# EAGLE board BeagleBone-Stomp-v0.1 (EAGLE 6.3)

Size 100 x 80 mm. Coordinates in mm from the lower left corner, seen from the top.
Outline: 0,0 100,0 100,80 0,80 0,0
Copper layers (1*16): Top 0.035mm / dielectric 1.5mm / Bottom 0.035mm
Design rules "default": minimum track width 10mil, minimum drill 24mil, track to track 8mil, track to pad 8mil, pad to pad 8mil, via to via 8mil, smd to smd 8mil, copper to edge 40mil, drill to drill 8mil, minimum pad ring 10mil, minimum via ring 8mil, stop-mask expansion 4mil, vias tented up to drill 0mil, thermal gap 10mil

## Footprints (pad centres in the part's own frame; a part is rotated, then mirrored left to right if it is on the bottom)
0402 = smd 0.7 x 0.9: 1 -0.65,0; 2 0.65,0
0805 = smd 1.3 x 1.5: 1 -0.95,0; 2 0.95,0
_0402 = smd 0.6 x 0.6: 1 -0.508,0; 2 0.508,0
2,15/1,0 = drill 1.016 pad 2.159 octagon: 1 0,0
1X20_ROUND = drill 1 pad 1.676: 1 -24.13,0; 2 -21.59,0; 3 -19.05,0; 4 -16.51,0; 5 -13.97,0; 6 -11.43,0; 7 -8.89,0; 8 -6.35,0; 9 -3.81,0; 10 -1.27,0; 11 1.27,0; 12 3.81,0; 13 6.35,0; 14 8.89,0; 15 11.43,0; 16 13.97,0; 17 16.51,0; 18 19.05,0; 19 21.59,0; 20 24.13,0
1X06_ROUND = drill 1 pad 1.676: 1 -6.35,0; 2 -3.81,0; 3 -1.27,0; 4 1.27,0; 5 3.81,0; 6 6.35,0
DIPSWITCH_2PIN = smd 1.1 x 2: 1A -1.27,-4.4; 1B -1.27,4.4; 2A 1.27,-4.4; 2B 1.27,4.4
RHB32_3P45X3P45 = smd 0.838 x 0.279: 1 -2.464,1.753; 2 -2.464,1.245; 3 -2.464,0.762; 4 -2.464,0.254; 5 -2.464,-0.254; 6 -2.464,-0.762; 7 -2.464,-1.245; 8 -2.464,-1.753; 17 2.464,-1.753; 18 2.464,-1.245; 19 2.464,-0.762; 20 2.464,-0.254; 21 2.464,0.254; 22 2.464,0.762; 23 2.464,1.245; 24 2.464,1.753 | smd 0.279 x 0.838: 9 -1.753,-2.464; 10 -1.245,-2.464; 11 -0.762,-2.464; 12 -0.254,-2.464; 13 0.254,-2.464; 14 0.762,-2.464; 15 1.245,-2.464; 16 1.753,-2.464; 25 1.753,2.464; 26 1.245,2.464; 27 0.762,2.464; 28 0.254,2.464; 29 -0.254,2.464; 30 -0.762,2.464; 31 -1.245,2.464; 32 -1.753,2.464 | smd 3.454 x 3.454: 33 0,0 | drill 0.254: V 1.168,1.168; V_2 -1.168,-0.406; V_3 -1.168,-1.168; V_4 -1.168,0.406; V_5 -1.168,1.168; V_6 -0.406,-1.168; V_7 -0.406,-0.406; V_8 -0.406,0.406; V_9 -0.406,1.168; V_10 0.406,-1.168; V_11 0.406,-0.406; V_12 0.406,0.406; V_13 0.406,1.168; V_14 1.168,-1.168; V_15 1.168,-0.406; V_16 1.168,0.406
DRB8_1P75X1P5 = smd 0.838 x 0.356: 1 -1.473,0.965; 2 -1.473,0.33; 3 -1.473,-0.33; 4 -1.473,-0.965; 5 1.473,-0.965; 6 1.473,-0.33; 7 1.473,0.33; 8 1.473,0.965 | smd 1.499 x 1.753: 9 0,0 | drill 0.254: V 0,-0.406; V_2 0,0.406
SOIC8_150MIL = smd 0.6 x 2.2: 1 -1.905,-2.6; 2 -0.635,-2.6; 3 0.635,-2.6; 4 1.905,-2.6; 5 1.905,2.6; 6 0.635,2.6; 7 -0.635,2.6; 8 -1.905,2.6
NMJ4HFD2 = drill 1.4 pad 2.54 long: S 6.35,8.115; SN 6.35,-8.115; T -6.35,8.115; TN -6.35,-8.115
BEAGLEBONE_SHIELD = drill 1 square: 1 4.445,19.05; 47 52.705,19.05 | drill 1: 2 1.905,19.05; 3 4.445,21.59; 4 1.905,21.59; 5 4.445,24.13; 6 1.905,24.13; 7 4.445,26.67; 8 1.905,26.67; 9 4.445,29.21; 10 1.905,29.21; 11 4.445,31.75; 12 1.905,31.75; 13 4.445,34.29; 14 1.905,34.29; 15 4.445,36.83; 16 1.905,36.83; 17 4.445,39.37; 18 1.905,39.37; 19 4.445,41.91; 20 1.905,41.91; 21 4.445,44.45; 22 1.905,44.45; 23 4.445,46.99; 24 1.905,46.99; 25 4.445,49.53; 26 1.905,49.53; 27 4.445,52.07; 28 1.905,52.07; 29 4.445,54.61; 30 1.905,54.61; 31 4.445,57.15; 32 1.905,57.15; 33 4.445,59.69; 34 1.905,59.69; 35 4.445,62.23; 36 1.905,62.23; 37 4.445,64.77; 38 1.905,64.77; 39 4.445,67.31; 40 1.905,67.31; 41 4.445,69.85; 42 1.905,69.85; 43 4.445,72.39; 44 1.905,72.39; 45 4.445,74.93; 46 1.905,74.93; 48 50.165,19.05; 49 52.705,21.59; 50 50.165,21.59; 51 52.705,24.13; 52 50.165,24.13; 53 52.705,26.67; 54 50.165,26.67; 55 52.705,29.21; 56 50.165,29.21; 57 52.705,31.75; 58 50.165,31.75; 59 52.705,34.29; 60 50.165,34.29; 61 52.705,36.83; 62 50.165,36.83; 63 52.705,39.37; 64 50.165,39.37; 65 52.705,41.91; 66 50.165,41.91; 67 52.705,44.45; 68 50.165,44.45; 69 52.705,46.99; 70 50.165,46.99; 71 52.705,49.53; 72 50.165,49.53; 73 52.705,52.07; 74 50.165,52.07; 75 52.705,54.61; 76 50.165,54.61; 77 52.705,57.15; 78 50.165,57.15; 79 52.705,59.69; 80 50.165,59.69; 81 52.705,62.23; 82 50.165,62.23; 83 52.705,64.77; 84 50.165,64.77; 85 52.705,67.31; 86 50.165,67.31; 87 52.705,69.85; 88 50.165,69.85; 89 52.705,72.39; 90 50.165,72.39; 91 52.705,74.93; 92 50.165,74.93
FXO-HC735-12 = smd 1.8 x 2: E/D 0,0; GND 5.08,0; OUT 5.08,4.2; VDD 0,4.2

## Placement (x,y rotation side)
C1  0.1u  [0402]  42.55,49.53 0 top
C2  10u  [0805]  52.7,48.26 0 top
C3  0.1u  [0402]  57.78,39.37 0 top
C4  0.1u  [0402]  49.53,57.15 0 top
C5  0.1u  [0402]  38.1,49.53 0 top
C6  0.1u  [0402]  53.34,46.35 0 top
C7  10u  [0805]  62.23,48.26 0 top
C8  0.1u  [0402]  62.87,46.35 0 top
C9  0.01u  [0402]  21.59,77.47 0 top
C10  47u  [0805]  35.56,41.27 270 top
C11  0.1u  [0402]  10.79,78.11 0 top
C12  0.1u  [0402]  35.56,21.59 90 top
C14  0.1u  [0402]  46.99,33.66 0 top
C15  22u  [0805]  57.15,41.27 0 top
C16  22u  [0805]  66.67,42.55 0 top
C17  0.1u  [0402]  67.31,40.64 0 top
C18  10u  [0805]  37.47,51.44 0 top
C19  10u  [0805]  41.91,51.44 0 top
FB1  [_0402]  19.05,1.91 0 top
GND  WIREPAD2,15/1,0  [2,15/1,0]  90.17,14.61 0 top
JP1  [1X20_ROUND]  62.23,19.05 0 top
JP2  [1X20_ROUND]  62.23,21.59 0 top
JP3  [1X06_ROUND]  44.45,24.13 0 top
R1  28k  [0402]  53.98,57.15 0 top
R2  56.2k  [0402]  51.44,55.24 0 top
R3  100  [0402]  72.39,26.04 270 top
R4  100  [0402]  71.12,29.21 270 top
R5  100  [0402]  69.85,26.04 270 top
R6  100  [0402]  68.58,29.21 270 top
R7  100  [0402]  67.31,26.04 270 top
R8  100  [0402]  66.04,29.21 270 top
R9  100  [0402]  64.77,26.04 270 top
R10  10k  [0402]  63.5,29.21 270 top
R11  10k  [0402]  62.23,26.04 270 top
R12  10k  [0402]  60.96,29.21 270 top
R13  10k  [0402]  59.69,26.04 270 top
R14  10k  [0402]  58.42,29.21 270 top
R15  10k  [0402]  57.15,26.04 270 top
R16  10k  [0402]  55.88,29.21 270 top
R17  4.7k  [0402]  4.45,78.74 0 top
R18  4.7k  [0402]  4.45,76.83 0 top
R19  4.7k  [0402]  4.45,74.93 0 top
R20  4.7k  [0402]  4.45,73.03 0 top
R21  4.7k  [0402]  4.45,71.12 0 top
R22  10k  [0402]  4.45,68.58 0 top
RST  WIREPAD2,15/1,0  [2,15/1,0]  86.36,14.61 0 top
SPKM  WIREPAD2,15/1,0  [2,15/1,0]  63.5,34.29 0 top
SPKP  WIREPAD2,15/1,0  [2,15/1,0]  63.5,52.7 0 top
SW1  [DIPSWITCH_2PIN]  9.53,63.5 0 top
TST  WIREPAD2,15/1,0  [2,15/1,0]  82.55,14.61 0 top
U1  MSP430G2553_RHB_32  [RHB32_3P45X3P45]  41.91,31.75 0 top
U2  TLV320AIC3120_RHB_32  [RHB32_3P45X3P45]  41.91,43.81 270 top
U3  TPS73701_DRB_8  [DRB8_1P75X1P5]  41.91,55.88 0 top
U4  [SOIC8_150MIL]  11.43,73.03 0 top
U$1  NMJ4HFD2  [NMJ4HFD2]  18.41,27.94 180 top
U$2  BEAGLEBONE_OUTLINE  [BEAGLEBONE_SHIELD]  93.98,11.43 90 top
U$7  NMJ4HFD2  [NMJ4HFD2]  18.41,47.62 180 top
U$20  FXO-HC735-12  [FXO-HC735-12]  20.95,71.12 0 top
VCC  WIREPAD2,15/1,0  [2,15/1,0]  78.74,14.61 0 top

## Library data of the parts
C1-C12 C14-C19 FB1 JP1-JP3 R1-R22 SW1 U4 U$2 = microbuilder
GND RST SPKM SPKP TST VCC = wirepad
U1 = bone; DATASHEETURL: http://www.ti.com/lit/gpn/MSP430G2553; DESCRIPTION: MSP430G2x53, MSP430G2x13 Mixed Signal Microcontroller; FAMILY_NAME: Value Line; GENERIC_PART_NUMBER: MSP430G2553; INDUSTRY_STD_PKG_TYPE: QFN; MANUFACTURER: Texas Instruments; MANUFACTURER_PART_NUMBER: msp430g2553_rhb_32; PACKAGE_DESIGNATOR: RHB; PIN_COUNT: 32; VENDOR: Texas Instruments
U2 = bone; DATASHEETURL: http://www.ti.com/lit/gpn/TLV320AIC3120; DESCRIPTION: Low-Power Audio CODEC With miniDSP and 2.5-W Mono Class-D Speaker Amplifier; FAMILY_NAME: Audio CODEC; GENERIC_PART_NUMBER: TLV320AIC3120; INDUSTRY_STD_PKG_TYPE: QFN; MANUFACTURER: Texas Instruments; MANUFACTURER_PART_NUMBER: tlv320aic3120_rhb_32; PACKAGE_DESIGNATOR: RHB; PIN_COUNT: 32; VENDOR: Texas Instruments
U3 = bone; DATASHEETURL: http://www.ti.com/lit/gpn/TPS73701; DESCRIPTION: Single Output LDO, 1A, Adj. (1.2 to 5.0V), Reverse Current Protection; FAMILY_NAME: SINGLE CHANNEL LDO; GENERIC_PART_NUMBER: TPS73701; INDUSTRY_STD_PKG_TYPE: SON; MANUFACTURER: Texas Instruments; MANUFACTURER_PART_NUMBER: tps73701_drb_8; PACKAGE_DESIGNATOR: DRB; PIN_COUNT: 8; VENDOR: Texas Instruments
U$1 U$7 U$20 = bone

## Nets
1.8V: C4.2 C5.1 C18.1 R1.1 U2.3 U3.1
3.3V: C1.1 C2.1 C6.1 C7.1 C8.1 C9.1 C11.1 C14.1 C19.1 JP3.1 JP3.2 JP3.3 JP3.4 JP3.5 JP3.6 R3.1 R4.1 R5.1 R6.1 R7.1 R8.1 R9.1 R10.1 R11.1 R12.1 R13.1 R14.1 R15.1 R16.1 R17.2 R18.2 R19.2 R20.2 R21.2 R22.2 U1.29 U1.30 U2.2 U2.17 U2.28 U3.5 U3.8 U4.8 U$2.49 U$2.50 U$20.VDD VCC.1
5.0V: C3.1 C15.1 C16.1 C17.1 U2.21 U2.24 U$2.53 U$2.54
AGND: C2.2 C3.2 C6.2 C7.2 C8.2 C15.2 C16.2 C17.2 FB1.1 U2.16 U2.20 U2.25 U2.29 U2.33 U$1.S U$7.S
CODEC_BCLK: U2.7 U$2.77
CODEC_DIN: U2.5 U$2.71
CODEC_DOUT: U2.4 U$2.74
CODEC_MCLK: U2.8 U$20.OUT
CODEC_WCLK: U2.6 U$2.75
GND: C1.2 C5.2 C9.2 C11.2 C14.2 C18.2 C19.2 FB1.2 GND.1 JP1.1 JP1.2 JP1.3 JP1.4 JP1.5 JP1.6 JP1.7 JP1.8 JP1.9 JP1.10 JP1.11 JP1.12 JP1.13 R2.1 SW1.1A SW1.2A U1.27 U1.28 U1.33 U2.1 U2.18 U3.4 U3.9 U4.4 U$2.1 U$2.2 U$2.47 U$2.48 U$2.89 U$2.90 U$2.91 U$2.92 U$20.GND
GNDA_ADC: U$2.80
I2C_CLK: R17.1 U1.21 U2.10 U4.6 U$2.65
I2C_DATA: R18.1 U1.22 U2.9 U4.5 U$2.66
LED1: JP1.14 U1.14
LED2: JP1.15 U1.15
LED3: JP1.16 U1.16
LED4: JP1.17 U1.17
LED5: JP1.18 U1.18
LED6: JP1.19 U1.19
LED7: JP1.20 U1.20
N$1: C4.1 R1.2 R2.2 U3.3
N$3: SPKM.1 U2.19 U2.23
N$4: SPKP.1 U2.22 U2.26
N$5: R19.1 SW1.1B U4.1
N$6: C10.2 U$7.T
N$7: JP2.20 R3.2
N$8: C10.1 U2.27
N$9: C12.1 U$1.T
N$10: C12.2 U2.14
N$11: R20.1 SW1.2B U4.2
N$12: R21.1 U4.3
N$13: JP2.14 R9.2
N$14: JP2.15 R8.2
N$15: JP2.16 R7.2
N$16: JP2.17 R6.2
N$18: R22.1 U4.7
N$22: JP2.18 R5.2
N$23: JP2.19 R4.2
N$32: TST.1 U1.24
N$33: RST.1 U1.23
POT1: JP2.1 U1.31
POT2: JP2.2 U1.1
POT3: JP2.3 U1.2
POT4: JP2.4 U1.3
POT5: JP2.5 U1.4
POT6: JP2.6 U1.5
RESET: U2.31 U$2.56
STOMP1: JP2.7 R16.2 U1.6
STOMP2: JP2.8 R15.2 U1.7
STOMP3: JP2.9 R14.2 U1.9
STOMP4: JP2.10 R13.2 U1.10
STOMP5: JP2.11 R12.2 U1.11
STOMP6: JP2.12 R11.2 U1.12
STOMP7: JP2.13 R10.2 U1.13
VDD_5V: U$2.51 U$2.52
VDD_ADC: U$2.78

## Tracks (layer width: path | path; a pad name or v marks a point on that pad's centre or on a via)
1.8V  (5 unrouted)
3.3V  (46 unrouted)
5.0V  (7 unrouted)
AGND  (15 unrouted)
CODEC_BCLK  (1 unrouted)
CODEC_DIN  (1 unrouted)
CODEC_DOUT  (1 unrouted)
CODEC_MCLK  (1 unrouted)
CODEC_WCLK  (1 unrouted)
GND  (41 unrouted)
I2C_CLK  (4 unrouted)
I2C_DATA  (4 unrouted)
LED1  (1 unrouted)
LED2  (1 unrouted)
LED3  (1 unrouted)
LED4  (1 unrouted)
LED5  (1 unrouted)
LED6  (1 unrouted)
LED7  (1 unrouted)
N$1  (3 unrouted)
N$3  (2 unrouted)
N$4  (2 unrouted)
N$5  (2 unrouted)
N$6  (1 unrouted)
N$7  (1 unrouted)
N$8  (1 unrouted)
N$9  (1 unrouted)
N$10  (1 unrouted)
N$11  (2 unrouted)
N$12  (1 unrouted)
N$13  (1 unrouted)
N$14  (1 unrouted)
N$15  (1 unrouted)
N$16  (1 unrouted)
N$18  (1 unrouted)
N$22  (1 unrouted)
N$23  (1 unrouted)
N$32  (1 unrouted)
N$33  (1 unrouted)
POT1  (1 unrouted)
POT2  (1 unrouted)
POT3  (1 unrouted)
POT4  (1 unrouted)
POT5  (1 unrouted)
POT6  (1 unrouted)
RESET  (1 unrouted)
STOMP1  (2 unrouted)
STOMP2  (2 unrouted)
STOMP3  (2 unrouted)
STOMP4  (2 unrouted)
STOMP5  (2 unrouted)
STOMP6  (2 unrouted)
STOMP7  (2 unrouted)
VDD_5V  (1 unrouted)